# EAGLE board płytka_poziomica (EAGLE 9.6.2)
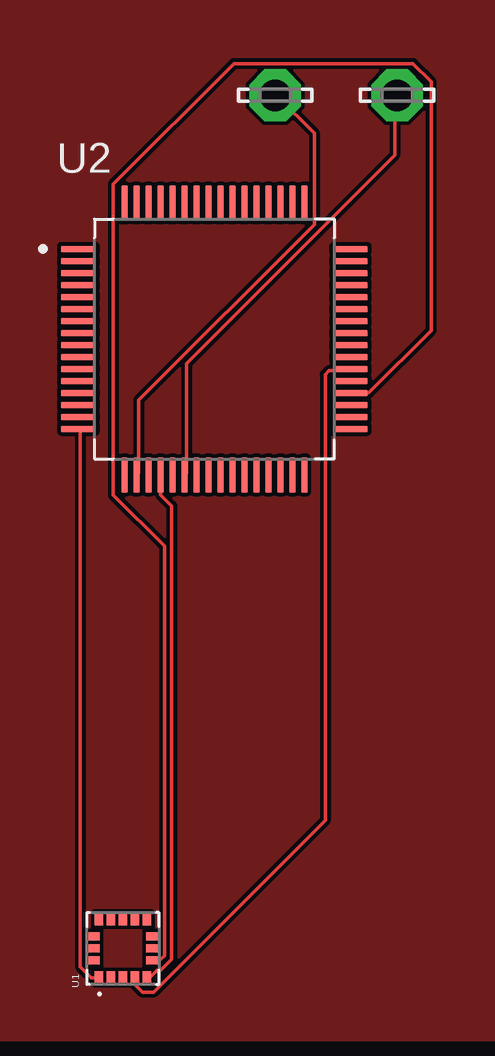
[diagram p0: board, top side]

No outline drawn. Coordinates in mm, seen from the top.
Copper layers (1*16): Top 0.035mm / dielectric 1.5mm / Bottom 0.035mm
Design rules "default": minimum track width 6mil, minimum drill 0.35mm, track to track 6mil, track to pad 6mil, pad to pad 6mil, via to via 6mil, smd to smd 6mil, copper to edge 40mil, drill to drill 6mil, minimum pad ring 10mil, minimum via ring 8mil, stop-mask expansion 4mil, vias tented up to drill 0mil, thermal gap 10mil

## Footprints (pad centres in the part's own frame; a part is rotated, then mirrored left to right if it is on the bottom)
LSP13 = drill 1.321 pad 2.159 octagon: MP 0,0
PQFN50P300X300X100-16N = smd 0.52 x 0.35: 1 -1.225,1; 2 -1.225,0.5; 3 -1.225,0; 4 -1.225,-0.5; 5 -1.225,-1; 9 1.225,-1; 10 1.225,-0.5; 11 1.225,0; 12 1.225,0.5; 13 1.225,1 | smd 0.35 x 0.52: 6 -0.5,-1.225; 7 0,-1.225; 8 0.5,-1.225; 14 0.5,1.225; 15 0,1.225; 16 -0.5,1.225
QFP50P1200X1200X160-64N = smd 1.47 x 0.28: 1 -5.67,3.75; 2 -5.67,3.25; 3 -5.67,2.75; 4 -5.67,2.25; 5 -5.67,1.75; 6 -5.67,1.25; 7 -5.67,0.75; 8 -5.67,0.25; 9 -5.67,-0.25; 10 -5.67,-0.75; 11 -5.67,-1.25; 12 -5.67,-1.75; 13 -5.67,-2.25; 14 -5.67,-2.75; 15 -5.67,-3.25; 16 -5.67,-3.75; 33 5.67,-3.75; 34 5.67,-3.25; 35 5.67,-2.75; 36 5.67,-2.25; 37 5.67,-1.75; 38 5.67,-1.25; 39 5.67,-0.75; 40 5.67,-0.25; 41 5.67,0.25; 42 5.67,0.75; 43 5.67,1.25; 44 5.67,1.75; 45 5.67,2.25; 46 5.67,2.75; 47 5.67,3.25; 48 5.67,3.75 | smd 0.28 x 1.47: 17 -3.75,-5.67; 18 -3.25,-5.67; 19 -2.75,-5.67; 20 -2.25,-5.67; 21 -1.75,-5.67; 22 -1.25,-5.67; 23 -0.75,-5.67; 24 -0.25,-5.67; 25 0.25,-5.67; 26 0.75,-5.67; 27 1.25,-5.67; 28 1.75,-5.67; 29 2.25,-5.67; 30 2.75,-5.67; 31 3.25,-5.67; 32 3.75,-5.67; 49 3.75,5.67; 50 3.25,5.67; 51 2.75,5.67; 52 2.25,5.67; 53 1.75,5.67; 54 1.25,5.67; 55 0.75,5.67; 56 0.25,5.67; 57 -0.25,5.67; 58 -0.75,5.67; 59 -1.25,5.67; 60 -1.75,5.67; 61 -2.25,5.67; 62 -2.75,5.67; 63 -3.25,5.67; 64 -3.75,5.67

## Placement (x,y rotation side)
+  LSP13  [LSP13]  12.7,39.37 0 top
-  LSP13  [LSP13]  17.78,39.37 0 top
U1  LIS3DH  [PQFN50P300X300X100-16N]  6.35,3.81 90 top
U2  STM32G071RBT6TR  [QFP50P1200X1200X160-64N]  10.16,29.21 0 top

## Library data of the parts
+ - = solpad
U1 = LIS3DH; AVAILABILITY: In Stock; DESCRIPTION: Accelerometer X, Y, Z Axis ±2g, 4g, 8g, 16g 0.5Hz ~ 625Hz 16-LGA (3x3); MF: STMicroelectronics; MP: LIS3DH; PACKAGE: LGA-16 STMicroelectronics; PRICE: None; PURCHASE-URL: https://pricing.snapeda.com/search/part/LIS3DH/?ref=eda
U2 = STM32G071RBT6TR; AVAILABILITY: In Stock; DESCRIPTION: Mainstream Microcontroller, 32-bit MCU; MF: STMicroelectronics; MP: STM32G071RBT6TR; PACKAGE: None; PRICE: None

## Nets
GND1: U1.12
N$1: U1.1 U2.16
N$2: U1.5 U2.20
N$3: U1.6 U2.36
N$4: U1.4 U2.38
N$5: +.MP U2.18
N$6: -.MP U2.22
RES: U1.10
VBAT: U2.6
VDD: U1.14
VDD/VDDA: U2.8
VREF+: U2.7
VSS/VSSA: U2.9

## Tracks (layer width: path | path; a pad name or v marks a point on that pad's centre or on a via)
N$1
  Top 0.152: U1.1 5.33,2.59 5.03,2.59 4.57,3.05 4.57,25.45 U2.16
N$2
  Top 0.152: U1.5 7.47,2.59 7.77,2.9 7.92,2.9 8.38,3.35 8.38,22.25 7.92,22.71 7.92,23.47 U2.20
N$3
  Top 0.152: U1.6 7.62,3.35 7.92,3.35 8.08,3.5 8.08,20.57 5.94,22.71 5.94,35.66 10.97,40.69 18.44,40.69 19.2,39.93 19.2,29.57 16.61,26.98 15.85,26.98 U2.36
N$4
  Top 0.152: U1.4 6.86,2.44 6.86,2.29 7.16,1.98 7.62,1.98 14.78,9.14 14.78,27.74 14.94,27.89 15.7,27.89 U2.38
N$5
  Top 0.152: U2.18 7.01,23.62 7.01,26.67 14.33,33.98 14.33,37.8 12.8,39.32 +.MP
N$6
  Top 0.152: U2.22 8.99,23.62 8.99,28.19 17.68,36.88 17.68,39.32 -.MP
O
  pour Top: 0,0 24.13,0 25.4,1.27 25.4,41.91 22.86,44.45 1.27,44.45 -1.27,41.91 -1.27,1.27